# Altium PCB FPGA-Oscilloscope-route-01.PcbDoc (part 2 of 4)
Units mil, origin at the board's own origin, x right, y up, seen from the top; angles counter-clockwise.
Board outline 8300 x 5800 mil, 2 copper layers (Top Layer, Bottom Layer); 257 components, 397 nets, 1971 pads, 530 vias.
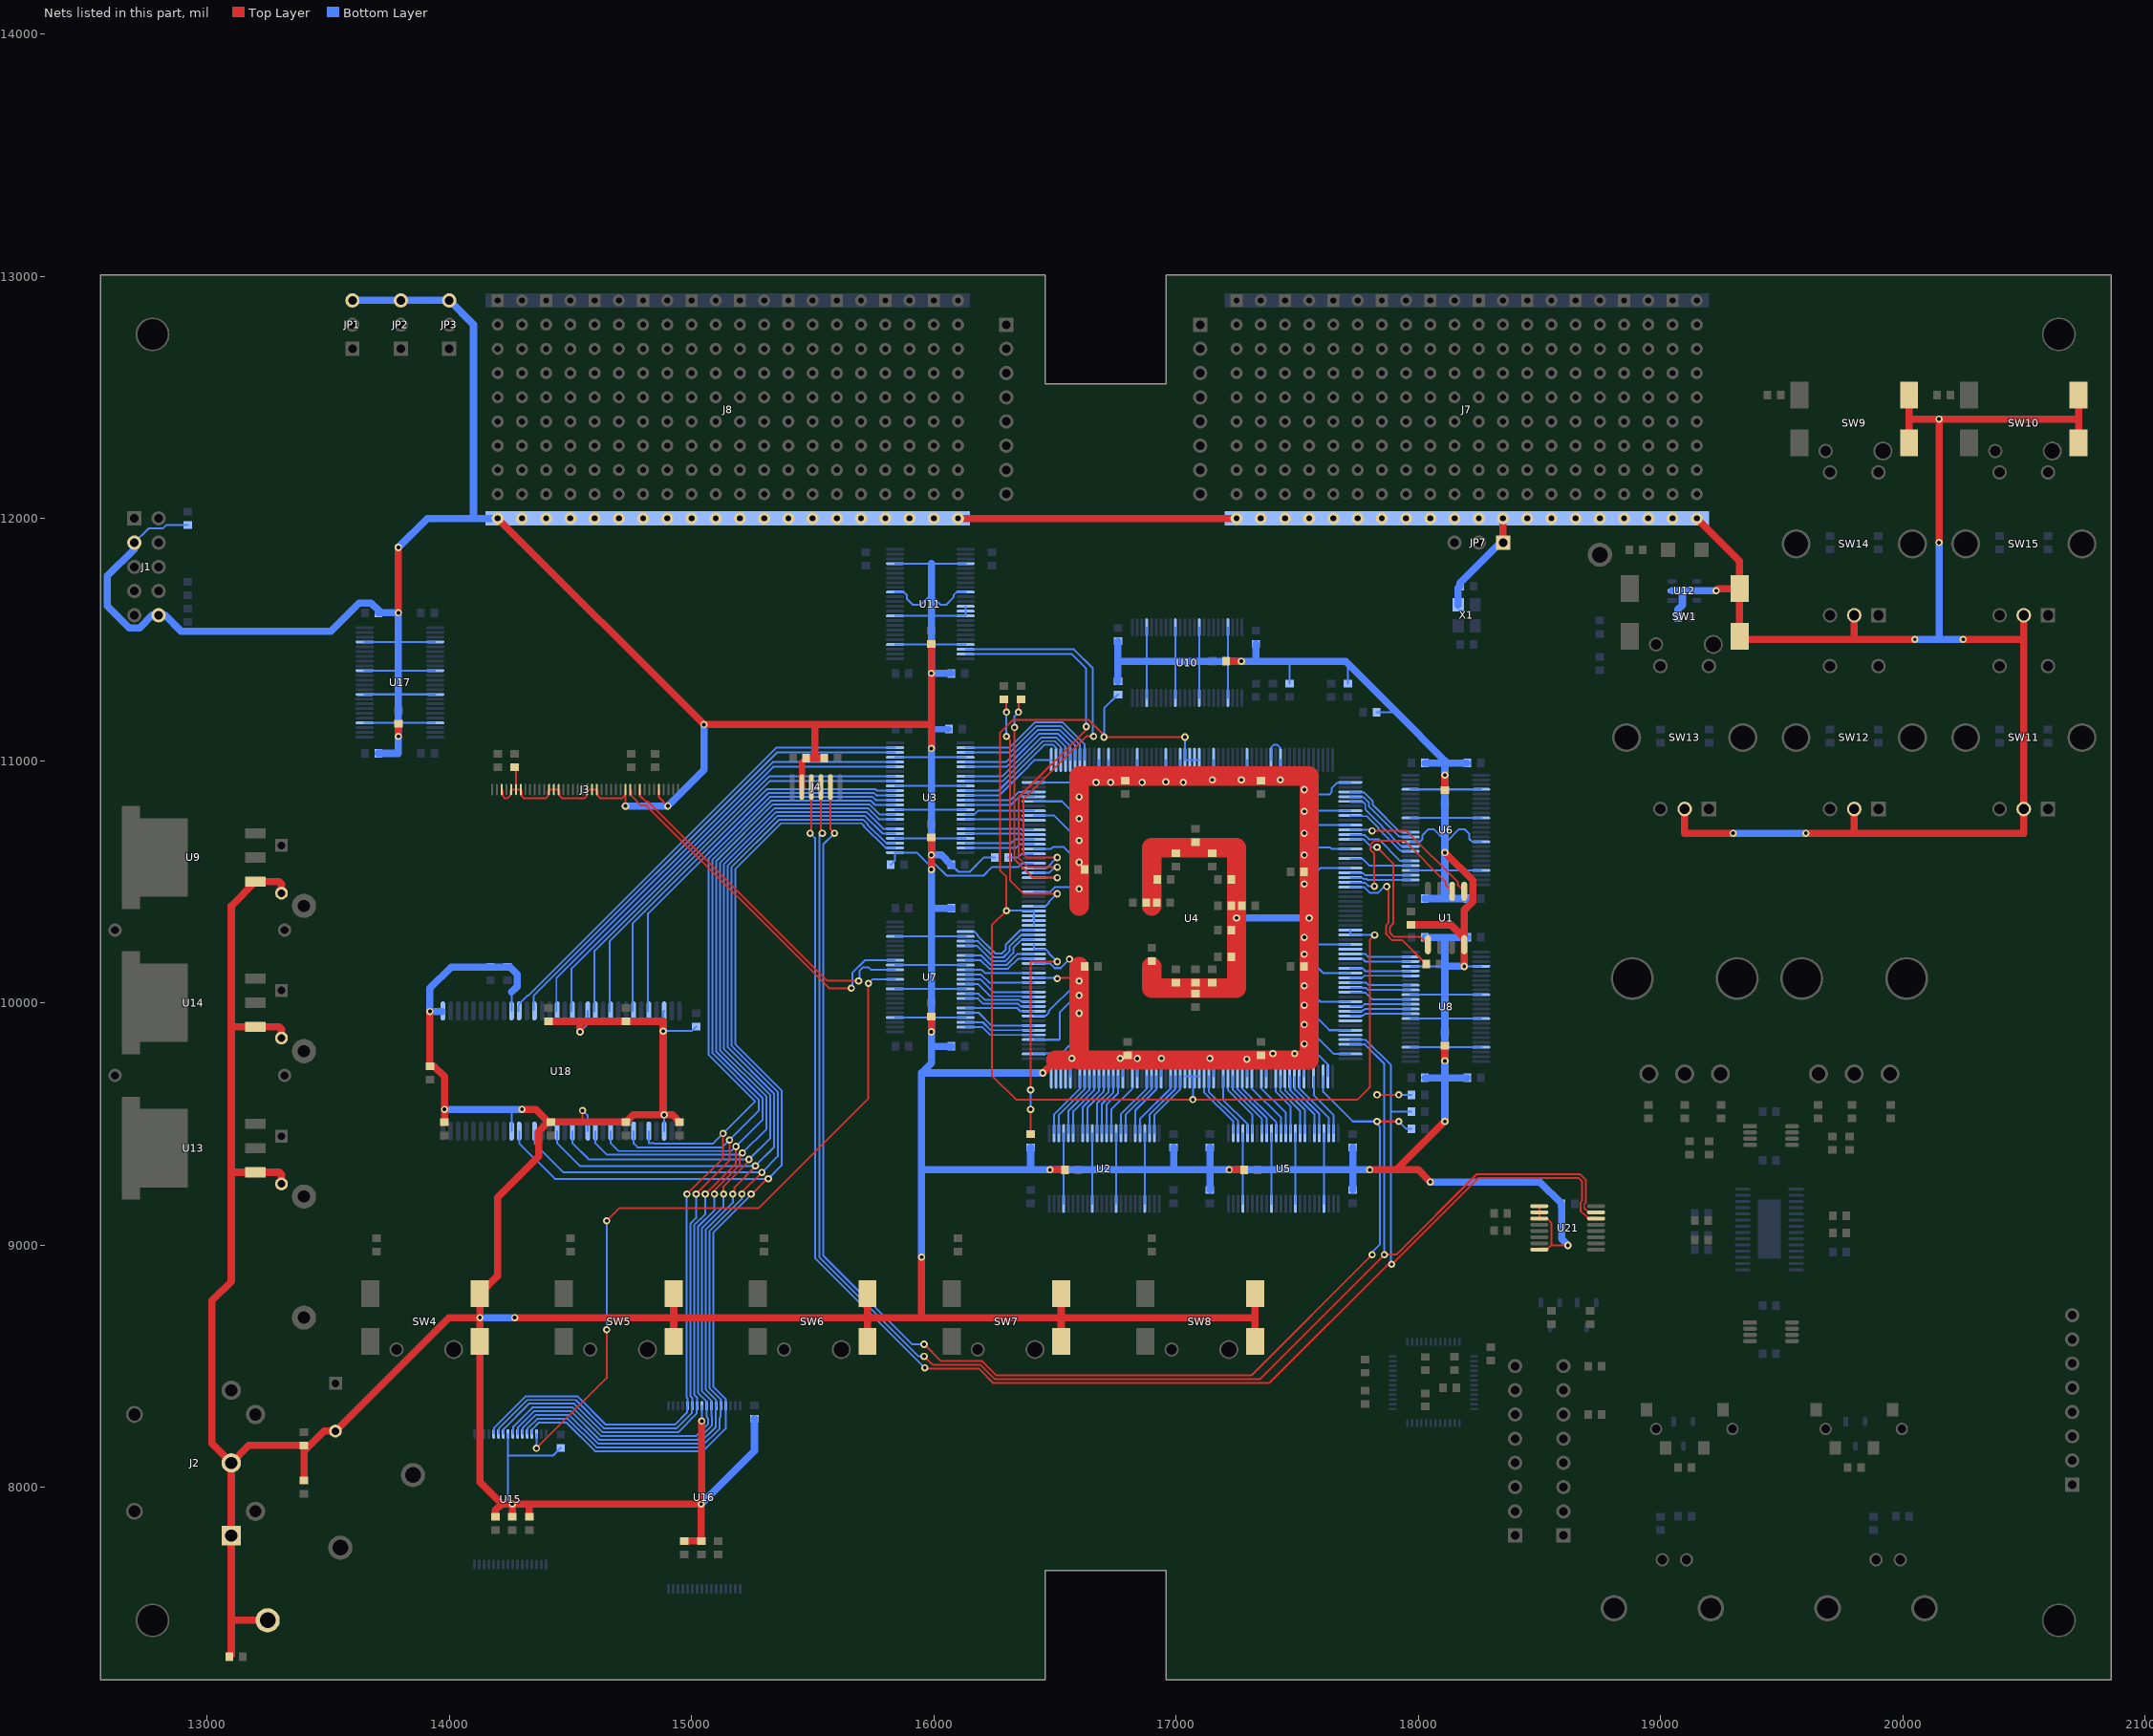
[diagram p2: the nets of this part, all layers, seen from the top]

## Via types
v1: diameter 30, hole 15, Top Layer to Bottom Layer, 530 vias

## Nets (pads, with @x,y where several pads share a name; then routed paths per layer and width w, separated by ;. In a path a pad name is that pad's centre, name@x,y a point inside that pad or via, vN(x,y) a via of type N, cw(c..) or ccw(c..) an arc to the next point about the centre after c; other vN are vias at no path point) (continued)
CLK2: R34.2 U4.33 U4.34 U4.89 U4.90 U4.91 U4.92 U4.149 U4.150 U4.151 U4.152 U4.209 U4.210 U4.211 U4.212 | length 5332.2
  Top Layer w7.8: v1(17036.93,11096.93) v1(16703.07,11096.93) 16703.07,11104.69 16640.62,11167.14 16326.15,11167.14 16273.3,11114.29 16273.3,10546.7 16300,10520 v1(16300,10380) 16240,10320 16240,9700 16340,9600 v1(17070,9600) 17750,9600 17800,9650 17800,10260 v1(17820,10280)
  Bottom Layer w7.8: v1(16300,10380) U4.152@16410,10380 ; 16410,10350 16412.91,10352.91 ; U4.149@16412.91,10319.76 U4.150@16412.91,10339.45 16412.91,10352.91 ; U4.152@16412.91,10378.82 U4.151@16412.91,10359.13 16412.91,10352.91 ; v1(16703.07,11096.93) 16703.07,11215.51 R34.2@16760,11272.44 ; U4.92@17036.93,9695.75 U4.91@17056.62,9695.75 U4.90@17075.75,9695.75 ; v1(17036.93,11096.93) U4.209@17036.93,11002.83 U4.210@17056.62,11002.83 U4.211@17076.3,11002.83 U4.212@17095.99,11002.83 ; v1(17070,9600) 17070,9690 U4.90@17075.75,9695.75 ; U4.89@17095.99,9695.75 U4.90@17076.3,9695.75 U4.90@17075.75,9695.75 ; U4.33@17720,10300.08 U4.34@17720,10280.39 17720.39,10280 v1(17820,10280)
CLKUSR: R24.2 U4.164 | length 108.6
  Bottom Layer w7.8: R24.2@16307.56,10600 16348.57,10600 16361.53,10612.96 U4.164@16410.83,10612.96
CONFDONE: R17.2 U4.153 | length 1089.6
  Top Layer w7.8: v1(16300,11100) 16315.6,11084.4 16315.6,10504.4 16370,10450 v1(16510,10450) ; v1(16300,11200) R17.2@16300,11250
  Bottom Layer w7.8: v1(16300,11100) v1(16300,11200) ; U4.153@16412.91,10398.5 16414.99,10400.58 16464.3,10400.58 16474.61,10410.9 16474.61,10414.61 v1(16510,10450)
D\C\L\K\: J3.30 U7.16 | length 1528.6
  Top Layer w7.8: J3.30@14747.09,10880.63 14751.14,10876.58 14751.14,10854.46 14791.5,10814.1 14813.61,10814.1 15567.71,10060 v1(15660,10060)
  Bottom Layer w7.8: v1(15660,10060) 15663.3,10063.3 15663.3,10123.12 15715.45,10175.27 U7.16@15840,10175.27
DATA0: R6.1 U4.24 | length 583.7
  Top Layer w7.8: v1@17870,10470 17876.7,10463.3 17876.7,10328.94 17867.7,10319.94 17867.7,10282.48 17892.48,10257.7 17934.74,10257.7 R6.1@18032.44,10160
  Bottom Layer w7.8: U4.24@17720,10477.24 17777.24,10477.24 17800.13,10454.36 17834.36,10454.36 17860,10480 v1@17870,10470
  other v1: 17870,10480
DATA1: U1.5 U4.12 | length 581.7
  Top Layer w7.8: v1(17810,10710) 17951.52,10710 18163.7,10497.82 18163.7,10486.3 U1.5@18190,10460
  Bottom Layer w7.8: U4.12@17720,10713.46 17806.54,10713.46 v1(17810,10710)
DB0: U3.12 U15.21 U16.21 U18.5 | length 4684.6
  Top Layer w7.8: v1(14981.25,9210) 15130,9358.75 v1(15130,9460)
  Bottom Layer w7.8: U15.21@14185.54,8221.45 14185.54,8245.2 14315.9,8375.56 14528.51,8375.56 14646.34,8257.72 14931.4,8257.72 14981.39,8307.7 14981.39,8333.83 U16.21@14983.47,8335.91 14983.47,8366.1 14980,8369.56 14980,9208.75 v1(14981.25,9210) ; U18.5@14824.01,9470 14824.01,9420 14845.52,9420 14846.59,9418.93 15088.93,9418.93 v1(15130,9460) 15262.78,9592.78 15070.8,9784.77 15070.8,10597.29 15323.58,10850.07 15747.44,10850.07 15760.98,10836.54 U3.12@15840,10836.54
DB1: U3.11 U15.22 U16.22 U18.7 | length 4754.3
  Top Layer w7.8: v1(15019.05,9210) 15156.73,9347.68 v1(15156.73,9433.27)
  Bottom Layer w7.8: U15.22@14205.23,8221.45 14205.23,8242.82 14322.37,8359.96 14522.05,8359.96 14639.88,8242.12 14937.87,8242.12 15001.07,8305.33 15001.07,8333.83 U16.22@15003.15,8335.91 15003.15,8368.47 14995.6,8376.02 14995.6,9087.97 15019.05,9111.42 v1(15019.05,9210) ; U18.7@14761.02,9470 14761.02,9418.98 14776.67,9403.33 15126.79,9403.33 v1(15156.73,9433.27) 15278.38,9554.93 15278.38,9599.25 15086.4,9791.23 15086.4,10590.83 15330.04,10834.47 15740.98,10834.47 15758.6,10816.85 U3.11@15840,10816.85
DB2: U3.9 U15.23 U16.23 U18.10 | length 4862.5
  Top Layer w7.8: v1(15056.85,9210) 15183.46,9336.61 v1(15183.46,9406.54)
  Bottom Layer w7.8: U15.23@14224.91,8221.45 14224.91,8240.44 14328.83,8344.36 14515.58,8344.36 14633.42,8226.52 14944.33,8226.52 15020.76,8302.95 15020.76,8333.83 U16.23@15022.84,8335.91 15022.84,8370.85 15011.2,8382.49 15011.2,9081.51 15056.85,9127.16 v1(15056.85,9210) ; U18.10@14666.53,9470 14666.53,9420 14698.81,9387.73 15164.64,9387.73 v1(15183.46,9406.54) 15293.98,9517.07 15293.98,9605.71 15102,9797.69 15102,10584.37 15336.5,10818.87 15734.52,10818.87 15775.91,10777.48 U3.9@15840,10777.48
DB3: U3.8 U15.25 U16.25 U18.12 | length 4988.7
  Top Layer w7.8: v1@15100.19,9215.54 v1(15094.65,9210) 15094.65,9225.74 15199.06,9330.15 15199.06,9368.69 v1(15210.19,9379.81)
  Bottom Layer w7.8: U15.25@14264.28,8221.45 14264.28,8249.95 14343.09,8328.76 14509.12,8328.76 14626.96,8210.92 15018.68,8210.92 15069.22,8261.46 15069.22,8283.58 15062.21,8290.59 U16.25@15062.21,8335.91 15062.21,8354.9 15026.8,8390.3 15026.8,9075.05 15094.65,9142.9 v1(15094.65,9210) ; U18.12@14603.54,9470 14603.54,9420 14651.41,9372.13 v1@15202.5,9372.13 ; v1@15202.32,9372.32 15209.81,9379.81 v1(15210.19,9379.81) 15309.58,9479.21 15309.58,9612.17 15117.6,9804.15 15117.6,10577.91 15342.96,10803.27 15728.06,10803.27 15773.53,10757.8 U3.8@15840,10757.8
DB4: U3.6 U15.26 U16.26 U18.15 | length 5100.7
  Top Layer w7.8: v1@15126.26,9216.19 v1(15132.45,9210) 15132.45,9241.48 15236.91,9345.94 v1(15236.91,9353.09)
  Bottom Layer w7.8: U15.26@14281.89,8219.37 14283.97,8221.45 14283.97,8247.57 14349.55,8313.16 14502.66,8313.16 14620.49,8195.32 15025.14,8195.32 15084.82,8255 15084.82,8290.04 15081.89,8292.97 U16.26@15081.89,8335.91 15081.89,8357.28 15042.4,8396.77 15042.4,9068.59 15132.45,9158.64 v1(15132.45,9210) ; U18.15@14509.06,9470 14509.06,9420 14575.97,9353.09 v1(15236.91,9353.09) 15325.18,9441.35 15325.18,9618.63 15133.2,9810.61 15133.2,10571.45 15349.43,10787.67 15721.6,10787.67 15790.84,10718.43 U3.6@15840,10718.43
DB5: U3.5 U15.27 U16.27 U18.17 | length 5165
  Top Layer w7.8: v1(15170.25,9210) 15170.12,9210.12 15177.73,9217.73 15177.73,9237.73 15263.64,9323.64 v1(15263.64,9326.36)
  Bottom Layer w7.8: U15.27@14303.65,8221.45 14303.65,8245.2 14356.01,8297.56 14496.2,8297.56 14614.03,8179.72 15031.6,8179.72 15100.42,8248.54 15100.42,8334.75 U16.27@15101.58,8335.91 15101.58,8359.65 15058,8403.23 15058,9062.12 15170.25,9174.37 v1(15170.25,9210) ; U18.17@14446.06,9470 14446.06,9420 14539.71,9326.36 v1(15263.64,9326.36) 15340.78,9403.5 15340.78,9625.09 15148.8,9817.08 15148.8,10564.99 15355.89,10772.07 15715.13,10772.07 15788.47,10698.74 U3.5@15840,10698.74
DB6: U3.3 U15.28 U16.28 U18.20 | length 5288.1
  Top Layer w7.8: v1(15208.05,9210) 15204.02,9214.02 15289.63,9299.63 v1(15290.37,9299.63)
  Bottom Layer w7.8: U15.28@14323.34,8221.45 14323.34,8242.82 14362.48,8281.96 14489.74,8281.96 14607.57,8164.12 15038.06,8164.12 15116.02,8242.08 15116.02,8286.02 15119.18,8289.18 15119.18,8333.83 U16.28@15121.26,8335.91 15121.26,8362.03 15073.6,8409.69 15073.6,9055.66 15208.05,9190.11 v1(15208.05,9210) ; U18.20@14351.57,9470 14351.57,9420 14471.95,9299.63 v1(15290.37,9299.63) 15356.38,9365.64 15356.38,9631.55 15164.4,9823.54 15164.4,10558.52 15362.35,10756.47 15708.67,10756.47 15726.95,10738.2 15726.95,10735.71 15803.29,10659.37 U3.3@15840,10659.37
DB7: U3.2 U15.29 U16.29 U18.22 | length 5370.9
  Top Layer w7.8: v1(15245.85,9210) 15247.92,9207.92 15312.9,9272.9 v1(15317.1,9272.9)
  Bottom Layer w7.8: U18.22@14288.58,9470 14288.58,9420 14435.68,9272.9 v1(15317.1,9272.9) 15371.98,9327.78 15371.98,9638.02 15180,9830 15180,10552.06 15368.81,10740.87 15702.21,10740.87 15711.35,10731.73 15711.35,10729.25 15800.91,10639.69 U3.2@15840,10639.69 ; U15.29@14343.02,8221.45 14343.02,8240.44 14368.94,8266.36 14483.28,8266.36 14601.11,8148.52 15048.52,8148.52 15140.95,8240.95 U16.29@15140.95,8335.91 15140.95,8364.4 15090,8415.35 15090,9050 15245.85,9205.85 v1(15245.85,9210)
DB8: U3.23 U18.43 | length 2013.2
  Bottom Layer w7.8: U18.43@14284.72,9964.41 U18.43@14284.72,9987.71 ; U18.43@14288.58,9994.56 14324.02,10030 14327.01,10030 15350.08,11053.07 U3.23@15840,11053.07
DB9: U3.22 U18.45 | length 1967.2
  Bottom Layer w7.8: U18.45@14347.71,9969.92 14347.71,10028.64 15352.46,11033.39 U3.22@15840,11033.39
DB10: U3.20 U18.48 | length 1904.3
  Bottom Layer w7.8: U18.48@14442.2,9964.41 14442.2,10101.06 15335.15,10994.02 U3.20@15840,10994.02
DB11: U3.19 U18.50 | length 1857.2
  Bottom Layer w7.8: U18.50@14505.19,9964.41 14505.19,10141.99 15337.53,10974.33 U3.19@15840,10974.33
DB12: U3.17 U18.53 | length 1788.8
  Bottom Layer w7.8: U18.53@14599.68,9964.41 14599.68,10214.42 15320.22,10934.96 U3.17@15840,10934.96
DB13: U3.16 U18.55 | length 1741.6
  Bottom Layer w7.8: U18.55@14662.67,9964.41 14662.67,10255.35 15322.6,10915.28 U3.16@15840,10915.28
DB14: U3.14 U18.58 | length 1677.7
  Bottom Layer w7.8: U18.58@14757.16,9964.41 14757.16,10327.78 15310.66,10881.27 15760.37,10881.27 15765.64,10876 15839.91,10876 U3.14@15840,10875.91
DB15: U3.13 U18.60 | length 1633.9
  Bottom Layer w7.8: U18.60@14820.15,9964.41 14820.15,10368.71 15317.12,10865.67 15753.9,10865.67 15763.36,10856.22 U3.13@15840,10856.22
DCLK: U1.6 U4.23 | length 717.8
  Top Layer w7.8: v1(17818.94,10481.06) 17818.94,10615.54 17803.3,10631.18 17803.3,10653.3 17818.94,10668.94 17942.58,10668.94 18113.7,10497.82 18113.7,10486.3 U1.6@18140,10460
  Bottom Layer w7.8: U4.23@17722.08,10494.85 17781.7,10494.85 17795.49,10481.06 v1(17818.94,10481.06)
DEVCLRN: R12.2 U4.144 U4.145 | length 962.6
  Top Layer w7.8: R12.2@16400,9457.56 v1(16400,9560) ; v1(16400,9640) 16400,10170 v1(16510,10170)
  Bottom Layer w7.8: v1(16400,9560) v1(16400,9640) ; U4.145@16412.91,10241.02 U4.144@16412.91,10221.34 16414.99,10219.26 16464.3,10219.26 16474.61,10208.95 16474.61,10205.39 v1(16510,10170)
FLASH_NCE: U1.1 U4.14 | length 686.6
  Top Layer w7.8: v1(17830,10642.24) 17896.7,10575.54 17896.7,10326.88 17883.3,10313.48 17883.3,10288.94 17898.94,10273.3 18006.7,10273.3 U1.1@18040,10240
  Bottom Layer w7.8: U4.14@17720,10674.09 17776.08,10674.09 17807.94,10642.24 v1(17830,10642.24)
FLASHC\S\: U7.12 U15.30 | length 3000.5
  Top Layer w7.8: v1(14360,8160) 14650,8450 v1(14650,8650) ; v1(14650,9100) 14702.1,9152.1 15278.18,9152.1 15730,9603.92 v1(15730,10080)
  Bottom Layer w7.8: v1(14360,8160) U15.30@14360,8218.74 ; v1(14650,8650) v1(14650,9100) ; v1(15730,10080) 15746.53,10096.53 U7.12@15840,10096.53
GND: C1.2 C2.2 C3.1 C4.1 C5.1 C6.1 C7.1 C8.1 C9.1 C10.1 C11.1 C12.1 C13.1 C14.1 C15.1 C16.1 C17.1 C18.1 C19.1 C20.1 C21.1 C22.1 C23.1 C24.2 C25.1 C26.1 C27.1 C28.1 C29.1 C30.1 C31.1 C32.1 C33.1 C34.1 C35.1 C36.1 C37.2 C38.1 C39.1 C40.1 C41.1 C42.1 C43.1 C44.1 C45.1 C46.1 C47.1 C48.1 C49.1 C50.1 C51.1 C52.1 C53.1 C55.1 J1.2 J1.10 J2.1 J2.3 J3.3 J3.5 J3.6 J3.7 J3.13 J3.14 J3.15 J3.21 J3.22 J3.23 J3.29 J3.36 J4.2 J7.PGGND J8.PGGND JP1.3 JP2.3 JP3.3 JP7.1 JP8.1 L1.1 R7.1 R8.2 R10.2 R13.1 R18.1 R21.1 R22.2 R23.2 R24.1 R25.2 R26.2 R27.2 R28.2 R29.2 R30.2 R31.2 R32.2 R33.2 R34.1 R36.2 R38.2 R39.2 R40.2 R41.2 R44.2 R45.2 R48.2 R56.2 R57.2 R58.2 R60.2 R61.2 R63.1 R65.1 R69.2 R70.2 R71.2 R72.1 SW1.C SW4.C SW5.C SW6.C SW7.C SW8.C SW9.C SW10.C SW11.2 SW12.2 SW13.2 SW14.2 SW15.2 U1.4 U2.4 U2.10 U2.15 U2.21 U2.28 U2.34 U2.39 U2.45 U3.4 U3.10 U3.15 U3.21 U3.28 U3.34 U3.39 U3.45 U4.2 U4.8 U4.11 U4.16 U4.20 U4.36 U4.42 U4.48 U4.54 U4.59 U4.62 U4.67 U4.75 U4.79 U4.86 U4.97 U4.102 U4.105 U4.116 U4.122 U4.125 U4.130 U4.138 U4.141 U4.156 U4.165 U4.172 U4.175 U4.179 U4.191 U4.193 U4.199 U4.205 U4.208 U4.215 U4.222 U4.227 U4.229 U5.4 U5.10 U5.15 U5.21 U5.28 U5.34 U5.39 U5.45 U6.4 U6.10 U6.15 U6.21 U6.28 U6.34 U6.39 U6.45 U7.4 U7.10 U7.15 U7.21 U7.28 U7.34 U7.39 U7.45 U8.4 U8.10 U8.15 U8.21 U8.28 U8.34 U8.39 U8.45 U9.1 U10.4 U10.10 U10.15 U10.21 U10.28 U10.34 U10.39 U10.45 U11.4 U11.10 U11.15 U11.21 U11.28 U11.34 U11.37 U11.38 U11.39 U11.45 U12.2 U13.1 U14.1 U15.24 U16.24 U17.4 U17.10 U17.15 U17.21 U17.28 U17.34 U17.39 U17.45 U18.3 U18.13 U18.23 U18.33 U18.42 U18.52 U18.62 U21.1 U21.2 U21.3 U21.8 X1.2 | length 71180.9
  Top Layer w8: J3.3@14215.59,10880.63 14219.48,10876.74 14219.48,10854.49 14228.76,10845.2 14241.8,10845.2 14251.08,10854.49 J3.5@14251.08,10876.74 ; J3.5@14254.96,10880.63 J3.6@14274.65,10880.63 ; C46.1@14270,10972.44 14274.65,10967.79 J3.6@14274.65,10880.63 ; 14550,9507.56 v1(14550,9554.95) ; 14723.45,10854.42 14714.24,10845.2 14622.46,10845.2 14613.24,10854.42 14613.24,10876.68 J3.23@14609.29,10880.63 J3.22@14589.61,10880.63 J3.21@14569.92,10880.63 14565.97,10876.68 14565.97,10852.12 14559.06,10845.2 14464.98,10845.2 14455.76,10854.42 14455.76,10876.68 J3.15@14451.81,10880.63 J3.14@14432.13,10880.63 J3.13@14412.44,10880.63 14408.49,10876.68 14408.49,10854.42 14399.28,10845.2 14307.5,10845.2 14298.28,10854.42 14298.28,10876.68 J3.7@14294.33,10880.63 J3.6@14274.65,10880.63 ; v1(14727.4,10812.6) J3.29@14727.4,10880.63 ; J3.36@14865.2,10880.63 14865.2,10850 v1(14902.6,10812.6) ; v1(16510,10100) 16513.23,10103.23 16586.77,10103.23 ; v1(16560,10180) v1@16570,10180 ; U21.8@18500,8980.87 18505.92,8986.78 18537.68,8986.78 18549.2,8998.31 ; U21.1@18500,9160 U21.2@18500,9134.41 U21.3@18500,9108.82 18531.76,9108.82 18549.2,9091.38 18549.2,8998.31 ; v1(18618.31,8998.31) 18549.2,8998.31
  Top Layer w25: J4.2@15455.59,10890.63 15455.59,10992.44 C45.1@15473.78,11010.63
  Top Layer w30: L1.1@13100,7307.56 13100,7450 ; 13110,9300 U13.1@13200,9300 13297.56,9300 13307.09,9290.47 C24.2@13307.09,9251.97 ; JP8.1@13250,7450 13100,7450 ; C37.2@13307.09,9854.33 13307.09,9890.47 13297.56,9900 U14.1@13200,9900 13100,9900 ; C2.2@13307.09,10452.76 13307.09,10490.47 13297.56,10500 U9.1@13200,10500 13100,10400 13100,9900 ; C23.1@13400,8027.56 13400,8148.5 ; v1(13790,11100) C44.1@13790,11152.44 ; v1(13790,11610) v1(13790,11880) ; v1(13920,9964.41) C53.1@13920,9737.56 13937.64,9737.56 13980,9695.2 v1(13980,9560) C52.1@13980,9507.56 ; R57.2@14190,7877.56 14190,7903.46 14216.54,7930 ; J8.PGGND@14200,12000 v1(15051.3,11148.7) 15510,11148.7 ; C43.1@14260,7877.56 v1(14260,7930) ; v1(14270,8700) 14926.38,8700 ; v1(14300,9560) 14356.97,9560 14409.41,9507.56 14370,9468.15 14370,9366.86 14200,9196.86 14200,8872.05 SW4.C@14126.38,8798.43 v1(14126.38,8700) ; R58.2@14330,7877.56 14330,7930 ; C51.1@14420,9507.56 14550,9507.56 C47.1@14730,9507.56 14759.29,9536.85 14920.71,9536.85 C48.1@14950,9507.56 ; C49.1@14420,9923.15 14540,9923.15 ; v1(14540,9880) 14540,9923.15 ; v1@14883.15,9540.72 v1(14883.15,9883.15) 14883.15,9923.15 14540,9923.15 ; SW5.C@14926.38,8601.57 14926.38,8700 ; SW5.C@14926.38,8798.43 14926.38,8700 ; R61.2@14970,7777.56 C42.1@15040,7777.56 v1(15040,7930) 14330,7930 ; v1@15042.52,7932.52 v1(15042.52,8272.52) ; C45.1@15473.78,11010.63 R72.1@15548.66,11010.63 ; 15510,11011.85 15510,11148.7 ; SW6.C@15726.38,8601.57 15726.38,8700 ; SW6.C@15726.38,8798.43 15726.38,8700 ; v1(15950,8950) 15950,8700 ; v1(15990,9880) C16.1@15990,9942.44 ; v1(15990,10550) v1(15990,10610) C9.1@15990,10682.44 ; v1(15990,11050) 15990,11148.7 ; C7.1@15990,11482.44 v1(15990,11360) 15990,11148.7 ; J8.PGGND@16100,12000 J7.PGGND@17250,12000 ; v1(16450,9710) 16503.66,9763.66 ; v1(16480,9310) C4.1@16542.44,9310 ; SW7.C@16526.38,8601.57 16526.38,8700 ; SW7.C@16526.38,8798.43 16526.38,8700 ; C8.1@17207.56,11410 v1(17270,11410) ; v1(17220,9310) C5.1@17282.44,9310 ; SW8.C@17326.38,8601.57 17326.38,8700 ; SW8.C@17326.38,8798.43 17326.38,8700 ; v1(17800,9310) 17910,9310 ; C12.1@17970,10322.44 17970.75,10321.69 18135.52,10321.69 U1.4@18190,10267.21 ; v1(18050,9260) 18000,9310 17910,9310 ; v1(18110,9510) 17910,9310 ; v1(18110,9760) C6.1@18110,9822.44 ; v1(18110,10620) 18224.8,10505.2 18224.8,10417.59 18190,10382.79 U1.4@18190,10267.21 ; C3.1@18110,10877.56 v1(18110,10940) ; v1(18190,10150) U1.4@18190,10240 U1.4@18190,10267.21 ; JP7.1@18350,11900 J7.PGGND@18350,12000 ; SW13.2@19100,10800 19100,10700 v1(19300,10700) ; J7.PGGND@19150,12000 19326.38,11823.62 SW1.C@19326.38,11710.08 ; v1(19230,11701.65) 19238.43,11710.08 SW1.C@19326.38,11710.08 ; v1(19600,10700) 19800,10700 ; SW12.2@19800,10800 19800,10700 ; SW14.2@19800,11600 19800,11500 ; SW9.C@20026.38,12311.57 20026.38,12410 ; SW9.C@20026.38,12508.43 20026.38,12410 ; v1(20050,11500) 19800,11500 ; v1(20150,11900) v1(20150,12410) ; v1(20250,11500) 20500,11500 ; SW15.2@20500,11600 20500,11500 ; SW10.C@20726.38,12311.57 20726.38,12410 ; SW10.C@20726.38,12508.43 20726.38,12410 ; 13100,7450 J2.1@13100,7800 J2.3@13100,8100 ; J2.3@13100,8100 13020,8180 13020,8770 13100,8850 13100,9900 ; J2.3@13100,8100 13172.44,8172.44 C22.1@13400,8172.44 13400,8148.5 ; 13400,8148.5 13483.08,8231.57 C1.2@13530,8231.57 13998.42,8700 v1(14126.38,8700) ; v1(14126.38,8700) 14126.38,8020.16 14216.54,7930 ; 14216.54,7930 v1(14260,7930) ; v1(14260,7930) 14330,7930 ; 14926.38,8700 15726.38,8700 ; 15510,11148.7 15990,11148.7 ; 15726.38,8700 15950,8700 ; 15950,8700 16526.38,8700 ; 16526.38,8700 17326.38,8700 ; SW1.C@19326.38,11710.08 19326.38,11500 19800,11500 ; 19800,10700 20500,10700 SW11.2@20500,10800 20500,11500 ; 20026.38,12410 v1(20150,12410) ; v1(20150,12410) 20726.38,12410
  Top Layer w80: 16503.66,9763.66 v1@16560,9763.66 ; 16600,9763.66 v1@16770,9763.66 ; 16600,9770 v1(16600,9956.83) v1(16600,10030) v1(16600,10090) 16600,10150 ; 16600,10400 v1(16600,10470) v1(16600,10580) v1(16600,10670) v1(16600,10760) v1(16600,10850) 16600,10935.91 17350,10935.91 ; 16800,9763.66 16916.34,9763.66 ; 16900,10150 16900,10060 17250,10060 v1(17250,10350) 17250,10640 16900,10640 16900,10400 ; v1@16940,9763.66 v1@17130,9763.66 ; v1@17140,9763.66 17550,9763.66 v1(17550,10349.78) 17550,10935.91 17368.7,10935.91
  Bottom Layer w8: J1.2@12700,11900 12758.67,11958.67 12817.12,11958.67 12830.89,11972.44 R7.1@12920,11972.44 ; U17.28@13650.94,11155.28 13790,11155.28 U17.21@13942.28,11155.28 ; U17.34@13650.94,11273.39 13790,11273.39 U17.15@13942.28,11273.39 ; U17.39@13650.94,11371.81 13790,11371.81 ; U17.45@13650.94,11489.92 13789.92,11489.92 ; 13790,11489.92 U17.4@13942.28,11489.92 ; 13791.81,11371.81 U17.10@13942.28,11371.81 ; U15.24@14242.52,8219.37 14242.52,8130 ; U18.23@14257.09,9470 14257.09,9557.91 ; U18.42@14257.09,9966.06 14257.09,10043.82 ; v1(14260,7930) 14242.52,7947.48 14242.52,8130 ; R56.2@14460,8162.44 14427.56,8130 14242.52,8130 ; v1(14540,9880) 14572.05,9912.05 U18.52@14572.05,9966.06 ; v1(14550,9554.95) 14572.05,9532.91 U18.13@14572.05,9470 ; U18.3@14887.01,9470 v1(14887.01,9537.01) ; U18.62@14887.01,9966.06 14883.15,9962.2 v1(14883.15,9883.15) 15000.71,9883.15 R69.2@15020,9902.44 ; v1(15042.52,8272.52) U16.24@15042.52,8335.91 ; U7.4@15840,9939.05 15990,9939.05 U7.45@16131.34,9939.05 ; U7.10@15840,10057.16 15990,10057.16 U7.39@16131.34,10057.16 ; U7.15@15840,10155.59 15990,10155.59 U7.34@16131.34,10155.59 ; U7.21@15840,10273.7 15990,10273.7 U7.28@16131.34,10273.7 ; U3.4@15840,10679.06 15990,10679.06 U3.45@16131.34,10679.06 ; U3.10@15840,10797.17 15990,10797.17 U3.39@16131.34,10797.17 ; U3.15@15840,10895.59 15990,10895.59 U3.34@16131.34,10895.59 ; U3.21@15840,11013.7 15990,11013.7 U3.28@16131.34,11013.7 ; U11.4@15840,11479.06 15990,11479.06 U11.45@16131.34,11479.06 ; U11.10@15840,11597.17 15990,11597.17 U11.39@16131.34,11597.17 U11.38@16131.34,11616.85 U11.37@16131.34,11636.53 ; U11.15@15840,11695.59 15876.85,11695.59 15889.2,11683.24 15889.2,11668.45 15914.46,11643.2 15945.54,11643.2 15990,11687.66 ; U11.21@15840,11813.7 15990,11813.7 U11.28@16131.34,11813.7 ; 15990,11682.1 16028.9,11643.2 16051.1,11643.2 16082.14,11674.24 16082.14,11683.24 16094.49,11695.59 U11.34@16131.34,11695.59 ; R22.2@16072.44,10570 16101.96,10540.48 16148.5,10540.48 16208.02,10600 R24.1@16252.44,10600 ; U4.122@16412.91,9788.27 16414.89,9790.25 16527.28,9790.25 16567.4,9830.37 16567.4,9895.96 16600,9928.56 v1(16600,9956.83) ; U4.125@16412.91,9847.32 16517.32,9847.32 16520,9850 16520,9959.42 16590.58,10030 v1(16600,10030) ; U4.130@16412.91,9945.75 16414.89,9947.73 16464.34,9947.73 16474.71,9958.1 16474.71,9964.96 16582.35,10072.6 16582.6,10072.6 v1(16600,10090) ; U4.138@16412.91,10103.23 16506.77,10103.23 v1(16510,10100) ; U4.141@16412.91,10162.28 16479.82,10162.28 16498.9,10143.2 16523.2,10143.2 v1(16560,10180) ; U4.156@16412.91,10457.56 16479.66,10457.56 16498.9,10476.8 16593.2,10476.8 v1(16600,10470) ; U4.165@16412.91,10634.72 16484.48,10634.72 16492.35,10642.6 16537.4,10642.6 v1(16600,10580) ; U4.172@16412.91,10772.52 16497.48,10772.52 v1(16600,10670) ; U4.175@16412.91,10831.57 16528.43,10831.57 v1(16600,10760) ; U4.179@16412.91,10910.31 16559.69,10910.31 16600,10870 v1(16600,10850) ; U2.21@16536.3,9170 16536.3,9310 U2.28@16536.3,9461.34 ; U4.116@16564.49,9695.75 16564.49,9764.49 v1(16570,9770) ; U2.15@16654.41,9170 16654.41,9310 U2.34@16654.41,9461.34 ; v1(16670,10910) 16682.6,10922.6 U4.191@16682.6,11002.83 ; U4.193@16721.97,11002.83 16721.97,10918.03 v1(16730,10910) ; U2.10@16752.84,9170 16752.84,9310 U2.39@16752.84,9461.34 ; v1(16770,9770) 16781.02,9758.98 U4.105@16781.02,9695.75 ; U4.102@16840.08,9695.75 v1(16840.08,9769.92) ; U4.199@16840.08,11002.83 16840.08,10929.92 v1(16860,10910) ; U2.4@16870.95,9170 16870.95,9310 U2.45@16870.95,9461.34 ; U10.45@16879.05,11258.66 16879.05,11410 U10.4@16879.05,11550 ; U4.97@16938.5,9695.75 16938.5,9768.5 v1(16940,9770) ; v1(16958.19,10911.81) U4.205@16958.19,11002.83 ; U10.39@16997.16,11258.66 16997.16,11410 U10.10@16997.16,11550 ; U4.208@17017.25,11002.83 17017.25,10922.75 v1(17030,10910) ; U10.34@17095.59,11258.66 17095.59,11410 U10.15@17095.59,11550 ; v1(17140,9770) 17151.38,9758.62 17155.04,9758.62 U4.86@17155.04,9695.75 ; v1@17155.04,10914.96 U4.215@17155.04,11002.83 ; U10.28@17213.7,11258.66 17213.7,11410 U10.21@17213.7,11550 ; v1(17270,10920) 17292.84,10942.84 U4.222@17292.84,11002.83 ; U5.21@17276.3,9170 17276.3,9310 U5.28@17276.3,9461.34 ; U4.79@17292.84,9695.75 v1(17292.84,9767.16) ; U4.75@17371.58,9695.75 17371.58,9751.58 17400,9780 v1(17400,9790) ; U4.227@17391.26,11002.83 17393.24,11004.81 17393.24,11054.26 17403.61,11064.63 17418.28,11064.63 U4.229@17430.63,11052.28 ; U5.15@17394.41,9170 17394.41,9310 U5.34@17394.41,9461.34 ; v1(17430.63,10920.63) U4.229@17430.63,11002.83 ; R18.1@17470,11317.56 17470,11410 ; v1(17490,9790) 17529.06,9750.94 U4.67@17529.06,9695.75 ; U5.10@17492.84,9170 17492.84,9310 U5.39@17492.84,9461.34 ; v1(17530,9830) 17542.68,9830 17627.48,9745.2 U4.62@17627.48,9695.75 ; v1(17530,9910) 17651.73,9788.27 U4.59@17720,9788.27 ; v1(17530,9990) 17633.31,9886.69 U4.54@17720,9886.69 ; v1(17530,10070) 17595.2,10004.8 U4.48@17720,10004.8 ; v1(17530,10200) 17607.09,10122.91 U4.42@17720,10122.91 ; v1(17530,10270) 17558.98,10241.02 U4.36@17720,10241.02 ; v1(17530,10490) 17595.98,10555.98 U4.20@17720,10555.98 ; v1(17530,10610) 17561.84,10641.84 17636.06,10641.84 17643.18,10634.72 U4.16@17720,10634.72 ; v1(17530,10700) 17563.15,10733.15 U4.11@17720,10733.15 ; v1(17530,10790) 17532.2,10792.2 U4.8@17720,10792.2 ; v1(17530,10880) 17550,10860 17633.14,10860 17642.4,10869.26 17642.4,10884.82 17665.91,10908.34 17718.02,10908.34 U4.2@17720,10910.32 ; U5.4@17610.95,9170 17610.95,9310 U5.45@17610.95,9461.34 ; 17700,11410 17710,11400 R21.1@17710,11317.56 ; R13.1@17827.56,11200 17910,11200 ; U8.28@17968.66,9816.3 18110,9816.3 U8.21@18260,9816.3 ; U8.34@17968.66,9934.41 18110,9934.41 U8.15@18260,9934.41 ; U8.39@17968.66,10032.83 18110,10032.83 U8.10@18260,10032.83 ; U8.45@17968.66,10150.94 18110,10150.94 ; U6.28@17968.66,10546.3 18110,10546.3 U6.21@18260,10546.3 ; U6.34@17968.66,10664.41 18005.51,10664.41 18017.86,10676.76 18017.86,10692.46 18042.21,10716.8 18064.41,10716.8 18110,10671.21 18110,10664.41 18116.51,10664.41 18168.9,10716.8 18191.1,10716.8 18210.8,10697.1 18210.8,10676.76 18223.15,10664.41 U6.15@18260,10664.41 ; U6.39@17968.66,10762.83 18110,10762.83 U6.10@18260,10762.83 ; U6.45@17968.66,10880.94 18110,10880.94 U6.4@18260,10880.94 ; v1@18189.06,10150.94 U8.4@18260,10150.94
  Bottom Layer w25: 15997.56,11130 R23.2@16062.44,11130
  Bottom Layer w30: J1.2@12700,11900 12700,11874 12587.8,11761.8 12587.8,11638.2 12678.33,11547.67 12721.67,11547.67 J1.10@12774,11600 ; J1.10@12800,11600 12826.73,11600 12892.84,11533.89 13510.63,11533.89 13627.25,11650.52 13677.63,11650.52 13707.56,11620.59 R65.1@13707.56,11610 v1(13790,11610) 13790,11489.92 13790,11371.81 13790,11273.39 13790,11155.28 v1(13790,11100) 13790,11030 R63.1@13707.56,11030 ; JP1.3@13600,12900 JP2.3@13800,12900 JP3.3@14000,12900 14100,12800 14100,12000 ; v1(13790,11880) 13910,12000 14100,12000 ; v1(13920,9964.41) 13920,10060 14007.56,10147.56 R71.2@14170,10147.56 R70.2@14240,10147.56 14250.59,10147.56 14280.52,10117.63 14280.52,10067.25 14257.09,10043.82 ; v1@13925.59,9964.41 U18.33@13969.76,9964.41 ; v1(13980,9560) v1(14300,9560) ; v1(14126.38,8700) v1(14270,8700) ; J8.PGGND@14200,12000 14100,12000 ; v1(14727.4,10812.6) v1(14902.6,10812.6) 15051.3,10961.3 v1(15051.3,11148.7) ; v1(15040,7930) 15260,8150 R60.2@15260,8282.44 ; v1(15950,8950) 15950,9310 ; v1(15990,10550) 15990,10390 ; 15990,11122.44 v1(15990,11050) 15990,11013.7 15990,10895.59 15990,10797.17 15990,10679.06 v1(15990,10610) 16032.44,10610 R22.2@16072.44,10570 ; 15990,11813.7 15990,11597.17 15990,11479.06 v1(15990,11360) R48.2@16072.44,11360 ; R36.2@16072.44,9820 15990,9820 ; R33.2@16072.44,10390 15990,10390 ; R8.2@16400,9402.44 16400,9310 ; v1(16450,9710) 15950,9710 ; R34.1@16760,11327.56 16760,11410 ; R45.2@16760,11492.44 16760,11410 ; R10.2@16990,9402.44 16990,9310 ; R26.2@17140,9227.56 17140,9310 ; R25.2@17140,9402.44 17140,9310 ; v1(17250,10350) 17250.22,10349.78 v1(17550,10349.78) ; R44.2@17330,11482.44 17330,11410 ; 17700,11410 17470,11410 17330,11410 ; 17710,11400 17910,11200 18110,11000 18110,10990 ; R28.2@17730,9227.56 17730,9310 ; R27.2@17730,9402.44 17730,9310 ; v1(17800,9310) 17730,9310 ; R41.2@18027.56,9690 18110,9690 ; R39.2@18027.56,10270 18110,10270 ; R32.2@18027.56,10430 18110,10430 ; R30.2@18027.56,10990 18110,10990 ; v1(18050,9260) 18502.44,9260 C55.1@18592.44,9170 18592.44,9024.18 v1(18618.31,8998.31) ; v1(18110,9510) 18110,9690 ; X1.2@18164.57,11643.31 18164.57,11712.12 C10.1@18172.44,11720 18172.44,11732.44 18340,11900 JP7.1@18350,11900 ; v1@18189.06,10150.94 18110,10150.94 ; R40.2@18202.44,9690 18110,9690 ; R38.2@18202.44,10270 18110,10270 ; R31.2@18202.44,10430 18110,10430 ; R29.2@18202.44,10990 18110,10990 ; U12.2@19048.19,11701.02 19090,11701.02 ; C11.1@19072.44,11591.65 19072.44,11624.14 19090.67,11642.37 19090.67,11691.32 19090,11691.99 19090,11701.02 ; v1(19230,11701.65) 19229.37,11701.02 19090,11701.02 ; v1(19300,10700) v1(19600,10700) ; v1(20050,11500) 20150,11500 ; v1(20150,11900) 20150,11500 ; v1(20250,11500) 20150,11500 ; 15950,9310 16400,9310 ; 15950,9310 15950,9710 ; 15950,9710 15990,9750 15990,9820 ; 15990,9820 v1(15990,9880) 15990,9939.05 15990,10057.16 15990,10155.59 15990,10273.7 15990,10390 ; 16400,9310 v1(16480,9310) 16536.3,9310 16654.41,9310 16752.84,9310 16870.95,9310 16990,9310 ; 16760,11410 16879.05,11410 16997.16,11410 17095.59,11410 17213.7,11410 v1(17270,11410) 17330,11410 ; 16990,9310 17140,9310 ; 17140,9310 v1(17220,9310) 17276.3,9310 17394.41,9310 17492.84,9310 17610.95,9310 17730,9310 ; 18110,9690 v1(18110,9760) 18110,9816.3 18110,9934.41 18110,10032.83 18110,10150.94 ; 18110,10150.94 18110,10270 ; 18110,10430 18110,10546.3 v1(18110,10620) 18110,10664.41 18110,10762.83 18110,10880.94 v1(18110,10940) 18110,10990
  other v1: 17150,10920
H\S\Y\N\C\: J3.32 U7.14 | length 1445.5
  Top Layer w7.8: J3.32@14786.46,10880.63 14786.46,10856.14 14812.89,10829.7 14820.07,10829.7 15559.77,10090 v1(15690,10090)
  Bottom Layer w7.8: v1(15690,10090) 15693.3,10093.3 15693.3,10131.06 15708.94,10146.7 15731.06,10146.7 15741.86,10135.9 U7.14@15840,10135.9
I2C-I\N\T\: J4.5 R3.1 U4.63 | length 5697.4
  Top Layer w8: J4.5@15573.7,10890.63 15573.7,10716.3 v1(15590,10700) ; v1(15960,8590) 16030,8520 16200,8520 16258.7,8461.3 17311.3,8461.3 v1(17810,8960) v1@17810,8970 ; v1(17830,9510) v1(17920,9510)
  Bottom Layer w8: v1(15590,10700) 15543.2,10653.2 15543.2,8956.8 15910,8590 v1(15960,8590) ; U4.63@17607.8,9695.75 17607.8,9632.2 17730,9510 v1(17830,9510) 17830,9500 17842.6,9487.4 17842.6,9002.6 v1@17810,8970 ; v1(17920,9510) 17950,9480 R3.1@17971.34,9480
I2C-SCL: J4.3 R5.1 U4.56 U21.14 | length 6997.9
  Top Layer w7.8: v1@15494.96,10700 J4.3@15494.96,10890.63 ; v1(15962.87,8492.87) 15967.04,8488.7 16187.04,8488.7 16245.74,8430 17385.68,8430 v1@17887.84,8932.16 ; v1(17890,8920) 17892.06,8920 18248.76,9276.7 18661.06,9276.7 18676.7,9261.06 18676.7,9181.72 18669.55,9174.57 18669.55,9141.9 18698.66,9112.79 18730.28,9112.79 U21.14@18734.25,9108.82
  Bottom Layer w7.8: v1@15494.96,10700 15494.96,10695.04 15510.16,10679.84 15510.16,8945.58 v1(15962.87,8492.87) ; U4.56@17720,9847.32 17782.38,9847.32 17887.84,9741.86 17887.84,9550 ; v1@17887.84,8932.16 17887.84,9550 ; R5.1@17972.44,9550 17887.84,9550
  other v1: 15490,10700
I2C-SDA: J4.4 R4.1 U4.57 U21.15 | length 6954.5
  Top Layer w7.8: v1@15534.33,10700 J4.4@15534.33,10890.63 ; v1(15960,8540) 15995.7,8504.3 16193.5,8504.3 16252.2,8445.6 17345.6,8445.6 v1(17860,8960) 17910,8960 18242.3,9292.3 18667.52,9292.3 18692.3,9267.52 18692.3,9175.26 18685.15,9168.11 18685.15,9151.89 U21.15@18702.63,9134.41 ; v1(17830,9620) v1(17920,9620)
  Bottom Layer w7.8: v1@15534.33,10700 15527.5,10693.17 15527.5,8950.3 15937.8,8540 v1(15960,8540) ; U4.57@17720,9827.64 17780,9827.64 17860,9747.64 17860,9620 ; v1(17830,9620) 17860,9620 ; v1(17860,8960) 17860,9620 ; v1(17920,9620) R4.1@17972.44,9620
  other v1: 15540,10700
INITDONE: R16.2 U4.159 | length 977.5
  Top Layer w7.8: v1(16333.39,11136.61) 16332.87,11136.1 16332.87,10593.5 16409.75,10516.61 v1@16513.39,10516.61 ; v1(16350,11200) R16.2@16350,11251.1
  Bottom Layer w7.8: v1(16333.39,11136.61) 16333.39,11183.39 v1(16350,11200) ; U4.159@16412.91,10516.61 v1@16513.39,10516.61
  other v1: 16510,10516.61
IO4: U4.4 U6.36 | length 326.9
  Bottom Layer w7.8: U4.4@17720,10870.94 17722.08,10868.87 17776.14,10868.87 17812.9,10832.11 17812.9,10816.79 17923.83,10705.86 17966.58,10705.86 U6.36@17968.66,10703.78
IO5: U4.5 U6.35 | length 323.9
  Bottom Layer w7.8: U4.5@17720,10851.26 17722.08,10849.18 17773.76,10849.18 17797.3,10825.64 17797.3,10810.33 17921.46,10686.17 U6.35@17966.58,10686.17
IO6: U4.6 U6.33 | length 337.3
  Bottom Layer w7.8: U4.6@17720,10831.57 17722.08,10829.5 17771.39,10829.5 17781.7,10819.18 17781.7,10798.12 17852.3,10727.52 17852.3,10724.38 17929.87,10646.8 U6.33@17966.58,10646.8
IO9: U4.9 U6.32 | length 308.7
  Bottom Layer w7.8: U4.9@17720,10772.52 17722.08,10770.44 17787.32,10770.44 17836.7,10721.06 17836.7,10717.92 17927.5,10627.12 U6.32@17966.58,10627.12
IO13: U4.13 U6.30 | length 290.5
  Bottom Layer w7.8: U4.13@17722.08,10691.7 17780.54,10691.7 17796.64,10675.6 17836.46,10675.6 17926.39,10585.67 U6.30@17968.66,10585.67
IO18: U4.18 U6.29 | length 257.9
  Bottom Layer w7.8: U4.18@17722.08,10593.28 17771.39,10593.28 17798.68,10565.98 U6.29@17968.66,10565.98
IO21: U4.21 U6.27 | length 249.7
  Bottom Layer w7.8: U4.21@17722.08,10534.22 17773.76,10534.22 17781.37,10526.61 U6.27@17968.66,10526.61
IO22: U4.22 U6.26 | length 249.7
  Bottom Layer w7.8: U4.22@17722.08,10514.54 17771.39,10514.54 17775.47,10510.45 17788.16,10510.45 17790.85,10507.76 17967.83,10507.76 U6.26@17968.66,10506.93
IO37: U4.37
IO38: U4.38 U8.47 | length 204.1
  Bottom Layer w7.8: U4.38@17769.31,10201.65 17780.94,10201.65 17792.28,10190.31 U8.47@17968.66,10190.31
IO39: U4.39 U8.46 | length 204.1
  Bottom Layer w7.8: U4.39@17769.31,10181.97 17780.65,10170.63 U8.46@17968.66,10170.63
IO41: U4.41 U8.44 | length 253.4
  Bottom Layer w7.8: U4.41@17720,10142.6 17769.31,10142.6 17780.65,10131.26 U8.44@17968.66,10131.26
IO43: U4.43 U8.43 | length 252.1
  Bottom Layer w7.8: U4.43@17720,10103.23 17769.31,10103.23 17777.65,10111.57 U8.43@17968.66,10111.57
IO44: U4.44 U8.41 | length 253.4
  Bottom Layer w7.8: U4.44@17720,10083.54 17784.37,10083.54 17795.71,10072.2 U8.41@17968.66,10072.2
IO45: U4.45 U8.40 | length 250.4
  Bottom Layer w7.8: U4.45@17722.08,10061.78 17784.08,10061.78 17793.34,10052.52 U8.40@17968.66,10052.52
IO46: U4.46 U8.38 | length 258.6
  Bottom Layer w7.8: U4.46@17722.08,10042.09 17781.7,10042.09 17810.64,10013.15 U8.38@17968.66,10013.15
IO49: U4.49 U8.37 | length 249.2
  Bottom Layer w7.8: U4.49@17722.08,9987.2 17771.39,9987.2 17777.65,9993.46 U8.37@17968.66,9993.46
IO50: U4.50 U8.36 | length 249.2
  Bottom Layer w7.8: U4.50@17722.08,9967.51 17771.39,9967.51 17773.57,9969.69 17775.94,9969.69 17780.03,9973.78 U8.36@17968.66,9973.78
IO51: U4.51 U8.35 | length 249.2
  Bottom Layer w7.8: U4.51@17722.08,9947.83 17773.76,9947.83 17780.03,9954.09 U8.35@17968.66,9954.09
IO52: U4.52
IO55: U4.55
IO65: U4.65 U5.47 | length 265.5
  Bottom Layer w8: U4.65@17570.41,9693.77 17570.41,9617.25 17650.32,9537.34 U5.47@17650.32,9461.34
IO68: U4.68 U5.46 | length 281.8
  Bottom Layer w8: U4.68@17511.35,9693.77 17511.35,9644.32 17630.63,9525.04 U5.46@17630.63,9461.34
IO69: U4.69 U5.44 | length 273.7
  Bottom Layer w8: U4.69@17491.66,9693.77 17491.66,9641.66 17591.26,9542.07 U5.44@17591.26,9461.34
IO70: U4.70 U5.43 | length 276.5
  Bottom Layer w8: U4.70@17470,9695.75 17471.98,9693.77 17471.98,9639 17571.58,9539.41 U5.43@17571.58,9461.34
IO71: U4.71 U5.41 | length 219
  Bottom Layer w7.8: U4.71@17450.32,9646.44 17450.32,9638.46 17532.21,9556.57 U5.41@17532.21,9461.34
IO72: U4.72 U5.40 | length 268.3
  Bottom Layer w7.8: U4.72@17430.63,9695.75 17430.63,9636.09 17512.52,9554.2 U5.40@17512.52,9461.34
IO73: U4.73 U5.38 | length 210.9
  Bottom Layer w7.8: U4.73@17410.95,9646.44 17410.95,9633.71 17473.15,9571.5 U5.38@17473.15,9461.34
IO76: U4.76 U5.37 | length 227.2
  Bottom Layer w7.8: U4.76@17351.89,9646.44 17453.47,9544.87 U5.37@17453.47,9461.34
IO78: U4.78 U5.36 | length 235.3
  Bottom Layer w7.8: U4.78@17312.52,9646.44 17433.78,9525.18 U5.36@17433.78,9461.34
IO80: U4.80 U5.35 | length 243.5
  Bottom Layer w7.8: U4.80@17273.15,9646.44 17414.1,9505.5 U5.35@17414.1,9461.34
IO81: U4.81 U5.33 | length 235.3
  Bottom Layer w7.8: U4.81@17253.47,9646.44 17253.47,9644.06 17374.73,9522.8 U5.33@17374.73,9461.34
IO82: U4.82 U5.32 | length 284.6
  Bottom Layer w7.8: U4.82@17233.78,9695.75 17233.78,9641.69 17355.04,9520.43 U5.32@17355.04,9461.34
IO83: U4.83 U5.30 | length 227.2
  Bottom Layer w7.8: U4.83@17214.1,9646.44 17214.1,9639.31 17315.67,9537.74 U5.30@17315.67,9461.34
IO84: U4.84 U5.29 | length 276.5
  Bottom Layer w7.8: U4.84@17194.41,9695.75 17194.41,9599.62 17295.99,9498.05 U5.29@17295.99,9461.34
IO87: U4.87 U5.27 | length 284.6
  Bottom Layer w7.8: U4.87@17135.36,9695.75 17135.36,9633.02 17256.62,9511.76 U5.27@17256.62,9461.34
IO88: U4.88 U5.26 | length 235.3
  Bottom Layer w7.8: U4.88@17115.67,9646.44 17115.67,9630.65 17236.93,9509.39 U5.26@17236.93,9461.34
IO93: U2.47 U4.93 | length 278.7
  Bottom Layer w7.8: U2.47@16910.32,9461.34 16910.32,9534.76 17017.24,9641.69 U4.93@17017.24,9695.75
IO94: U2.46 U4.94 | length 278.7
  Bottom Layer w7.8: U2.46@16890.63,9461.34 16890.63,9537.13 16997.56,9644.06 U4.94@16997.56,9695.75
IO95: U2.44 U4.95 | length 286.9
  Bottom Layer w7.8: U2.44@16851.26,9461.34 16851.26,9519.83 16977.87,9646.44 U4.95@16977.87,9695.75
IO98: U2.43 U4.98 | length 270.5
  Bottom Layer w7.8: U2.43@16831.58,9461.34 16831.58,9554.44 16918.82,9641.69 U4.98@16918.82,9695.75
IO99: U2.41 U4.99 | length 278.7
  Bottom Layer w7.8: U2.41@16792.21,9461.34 16792.21,9537.14 16899.13,9644.06 U4.99@16899.13,9695.75
IO100: U2.40 U4.100 | length 278.7
  Bottom Layer w7.8: U2.40@16772.52,9461.34 16772.52,9539.51 16879.45,9646.44 U4.100@16879.45,9695.75
IO103: U2.38 U4.103 | length 221.2
  Bottom Layer w7.8: U2.38@16733.15,9461.34 16733.15,9559.2 U4.103@16820.39,9646.44
IO106: U2.37 U4.106 | length 254.2
  Bottom Layer w7.8: U2.37@16713.47,9461.34 16713.47,9579.55 16761.34,9627.43 U4.106@16761.34,9695.75
IO107: U2.36 U4.107 | length 254.2
  Bottom Layer w7.8: U2.36@16693.78,9461.34 16693.78,9581.93 16741.65,9629.8 U4.107@16741.65,9695.75
IO108: U2.35 U4.108 | length 254.2
  Bottom Layer w7.8: U2.35@16674.1,9461.34 16674.1,9584.31 16721.97,9632.18 U4.108@16721.97,9695.75
IO109: U2.33 U4.109 | length 262.4
  Bottom Layer w7.8: U2.33@16634.73,9461.34 16634.73,9567 16702.28,9634.56 U4.109@16702.28,9695.75
IO110: U2.32 U4.110 | length 262.4
  Bottom Layer w7.8: U2.32@16615.04,9461.34 16615.04,9569.37 16682.6,9636.93 U4.110@16682.6,9695.75
IO111: U2.30 U4.111 | length 270.5
  Bottom Layer w7.8: U2.30@16575.67,9461.34 16575.67,9552.07 16662.91,9639.31 U4.111@16662.91,9695.75
IO112: U2.29 U4.112 | length 270.5
  Bottom Layer w7.8: U2.29@16555.99,9461.34 16555.99,9554.44 16643.23,9641.69 U4.112@16643.23,9695.75
IO113: U2.27 U4.113 | length 278.7
  Bottom Layer w7.8: U2.27@16516.62,9461.34 16516.62,9537.14 16623.54,9644.06 U4.113@16623.54,9695.75
IO114: U2.26 U4.114 | length 278.7
  Bottom Layer w7.8: U2.26@16496.93,9461.34 16496.93,9539.51 16603.86,9646.44 U4.114@16603.86,9695.75
IO117: U4.117
IO118: U4.118
IO119: U4.119
IO120: U4.120
IO126: U4.126 U7.47 | length 295.1
  Bottom Layer w7.8: U7.47@16131.34,9899.68 16200.32,9899.68 16232.99,9867.01 U4.126@16412.91,9867.01
IO127: U4.127 U7.46 | length 295.1
  Bottom Layer w7.8: U7.46@16131.34,9919.37 16202.69,9919.37 16235.37,9886.69 U4.127@16412.91,9886.69
IO128: U4.128 U7.44 | length 303.3
  Bottom Layer w7.8: U7.44@16131.34,9958.74 16185.38,9958.74 16237.75,9906.38 U4.128@16412.91,9906.38
IO131: U4.131 U7.43 | length 287
  Bottom Layer w7.8: U7.43@16131.34,9978.42 16343.49,9978.42 16356.48,9965.43 U4.131@16412.91,9965.43
IO132: U4.132 U7.41 | length 295.1
  Bottom Layer w7.8: U7.41@16131.34,10017.79 16182.21,10017.79 16204.4,9995.6 16348.37,9995.6 16358.85,9985.12 U4.132@16412.91,9985.12
IO133: U4.133 U7.40 | length 295.1
  Bottom Layer w7.8: U7.40@16131.34,10037.48 16184.58,10037.48 16210.86,10011.2 16354.83,10011.2 16361.23,10004.8 U4.133@16412.91,10004.8
IO134: U4.134 U7.38 | length 303.3
  Bottom Layer w7.8: U7.38@16131.34,10076.85 16183.15,10076.85 16233.2,10026.8 16361.3,10026.8 16363.61,10024.49 U4.134@16412.91,10024.49
IO135: U4.135 U7.37 | length 303.3
  Bottom Layer w7.8: U7.37@16131.34,10096.53 16193.47,10096.53 16245.83,10044.17 U4.135@16412.91,10044.17
IO137: U4.137 U7.36 | length 295.1
  Bottom Layer w7.8: U7.36@16131.34,10116.22 16195.84,10116.22 16228.52,10083.54 U4.137@16412.91,10083.54
IO139: U4.139 U7.35 | length 287
  Bottom Layer w7.8: U7.35@16131.34,10135.9 16197.77,10135.9 16200.57,10133.1 16201.02,10133.1 16211.21,10122.91 U4.139@16412.91,10122.91
IO142: U4.142 U7.33 | length 313.3
  Bottom Layer w7.8: U7.33@16131.34,10175.27 16194.41,10175.27 16229.39,10140.3 16307.15,10140.3 16348.82,10181.97 U4.142@16412.91,10181.97
IO143: U4.143 U7.32 | length 316.7
  Bottom Layer w7.8: U7.32@16131.34,10194.96 16196.79,10194.96 16235.85,10155.9 16300.69,10155.9 16346.45,10201.65 U4.143@16412.91,10201.65
IO146: U4.146 U7.30 | length 356.1
  Bottom Layer w8: U7.30@16131.34,10234.33 16179.62,10234.33 16226.98,10186.98 16242.35,10171.6 16294.19,10171.6 16328.4,10205.81 16328.4,10225.64 16363.46,10260.71 U4.146@16412.91,10260.71
IO147: U4.147 U7.29 | length 359.3
  Bottom Layer w8: U7.29@16131.34,10254.01 16182.28,10254.01 16248.9,10187.4 16287.65,10187.4 16312.6,10212.35 16312.6,10232.19 16360.81,10280.39 U4.147@16412.91,10280.39
IO148: U4.148 U7.27 | length 335.5
  Bottom Layer w8: U7.27@16168.19,10293.38 16180.54,10281.03 16180.54,10278.1 16255.44,10203.2 16281.1,10203.2 16296.8,10218.9 16296.8,10238.73 16358.15,10300.08 U4.148@16412.91,10300.08
IO160: U4.160 U11.47 | length 1703.3
  Top Layer w8: v1(16510,10560) 16388.57,10560 16350,10598.57 16350,10848.28 16629.56,11127.85 v1(16629.56,11140.44)
  Bottom Layer w8: U11.47@16131.34,11439.68 16570.31,11439.68 16629.56,11380.44 v1(16629.56,11140.44) ; U4.160@16412.91,10536.3 16476.3,10536.3 16500,10560 v1(16510,10560)
IO161: U4.161 U11.46 | length 1710.8
  Top Layer w8: v1(16510,10600) 16382.96,10600 16370,10612.96 16370,10840 16630,11100 16642.59,11100 v1(16660,11100)
  Bottom Layer w8: U11.46@16131.34,11459.37 16578.91,11459.37 16656.36,11381.92 16656.36,11113.78 v1@16656.29,11113.71 ; U4.161@16412.91,10555.98 16465.98,10555.98 v1(16510,10600)
IO162: R15.2 U3.1 U4.162 | length 687.8
  Bottom Layer w7.8: R15.2@15822.44,10570 15840,10587.56 U3.1@15840,10620 15930,10620 15973.3,10576.7 16001.06,10576.7 16052.98,10524.78 16204.78,10524.78 16240,10560 16347.94,10560 16361.53,10573.59 U4.162@16410.83,10573.59
IO166: U3.47 U4.166 | length 287.7
  Bottom Layer w7.8: U3.47@16131.34,10639.69 16339.69,10639.69 16354.41,10654.41 U4.166@16412.91,10654.41
IO167: U3.46 U4.167 | length 287.7
  Bottom Layer w7.8: U3.46@16131.34,10659.37 16319.37,10659.37 16334.09,10674.09 U4.167@16412.91,10674.09
IO168: U3.44 U4.168 | length 234.3
  Bottom Layer w7.8: U3.44@16131.34,10698.74 16358.65,10698.74 U4.168@16363.61,10693.78
IO169: U3.43 U4.169 | length 280.7
  Bottom Layer w7.8: U3.43@16131.34,10718.43 16358.65,10718.43 16361.53,10715.54 U4.169@16410.83,10715.54
IO171: U3.41 U4.171 | length 234.3
  Bottom Layer w7.8: U3.41@16131.34,10757.8 16358.65,10757.8 U4.171@16363.61,10752.83
IO173: U3.40 U4.173 | length 287.7
  Bottom Layer w7.8: U3.40@16131.34,10777.48 16168.05,10777.48 16182.77,10792.2 U4.173@16412.91,10792.2
IO176: U3.38 U4.176 | length 295.8
  Bottom Layer w7.8: U3.38@16131.34,10816.85 16318.91,10816.85 16353.32,10851.26 U4.176@16412.91,10851.26
IO177: U3.37 U4.177 | length 295.8
  Bottom Layer w7.8: U3.37@16131.34,10836.54 16316.54,10836.54 16350.94,10870.94 U4.177@16412.91,10870.94
IO181: U3.36 U4.181 | length 415.1
  Bottom Layer w7.8: U3.36@16131.34,10856.22 16270.14,10856.22 16362.42,10948.5 16362.75,10948.5 16417.09,11002.83 U4.181@16485.75,11002.83
IO182: U3.35 U4.182 | length 457.4
  Bottom Layer w7.8: U3.35@16131.34,10875.91 16267.77,10875.91 16355.96,10964.1 16356.29,10964.1 16456.73,11064.53 16493.04,11064.53 U4.182@16505.43,11052.14
IO183: U3.33 U4.183 | length 524.4
  Bottom Layer w7.8: U3.33@16131.34,10915.28 16285.08,10915.28 16349.5,10979.7 16349.83,10979.7 16450.26,11080.13 16499.5,11080.13 16525.12,11054.52 U4.183@16525.12,11002.83
IO184: U3.32 U4.184 | length 550.2
  Bottom Layer w7.8: U3.32@16131.34,10934.96 16282.7,10934.96 16343.04,10995.3 16343.37,10995.3 16443.8,11095.73 16505.96,11095.73 16544.8,11056.89 U4.184@16544.8,11002.83
IO185: U3.30 U4.185 | length 567.9
  Bottom Layer w7.8: U3.30@16131.34,10974.33 16300.01,10974.33 16336.58,11010.9 16336.91,11010.9 16437.34,11111.33 16512.43,11111.33 16564.49,11059.27 U4.185@16564.49,11002.83
IO186: U3.29 U4.186 | length 593.7
  Bottom Layer w7.8: U3.29@16131.34,10994.02 16297.63,10994.02 16330.11,11026.5 16330.44,11026.5 16430.88,11126.93 16518.89,11126.93 16584.17,11061.65 U4.186@16584.17,11002.83
IO187: U3.27 U4.187 | length 611.4
  Bottom Layer w7.8: U3.27@16131.34,11033.39 16314.94,11033.39 16323.65,11042.1 16323.98,11042.1 16424.42,11142.53 16525.35,11142.53 16603.86,11064.02 U4.187@16603.86,11002.83
IO188: U3.26 U4.188 | length 637.3
  Bottom Layer w7.8: U3.26@16131.34,11053.07 16312.56,11053.07 16317.19,11057.7 16317.52,11057.7 16417.96,11158.13 16531.87,11158.13 16623.54,11066.46 U4.188@16623.54,11002.83